# Altium PCB project.PcbDoc
Units mm, origin at the board's own origin, x right, y up, seen from the top; angles counter-clockwise.
Board outline 70.2 x 69.13 mm, 4 copper layers (Top Layer, Int1 (GND), Int2 (PWR), Bottom Layer), stack 1.591 mm thick; 49 components, 41 nets, 190 pads, 27 vias.
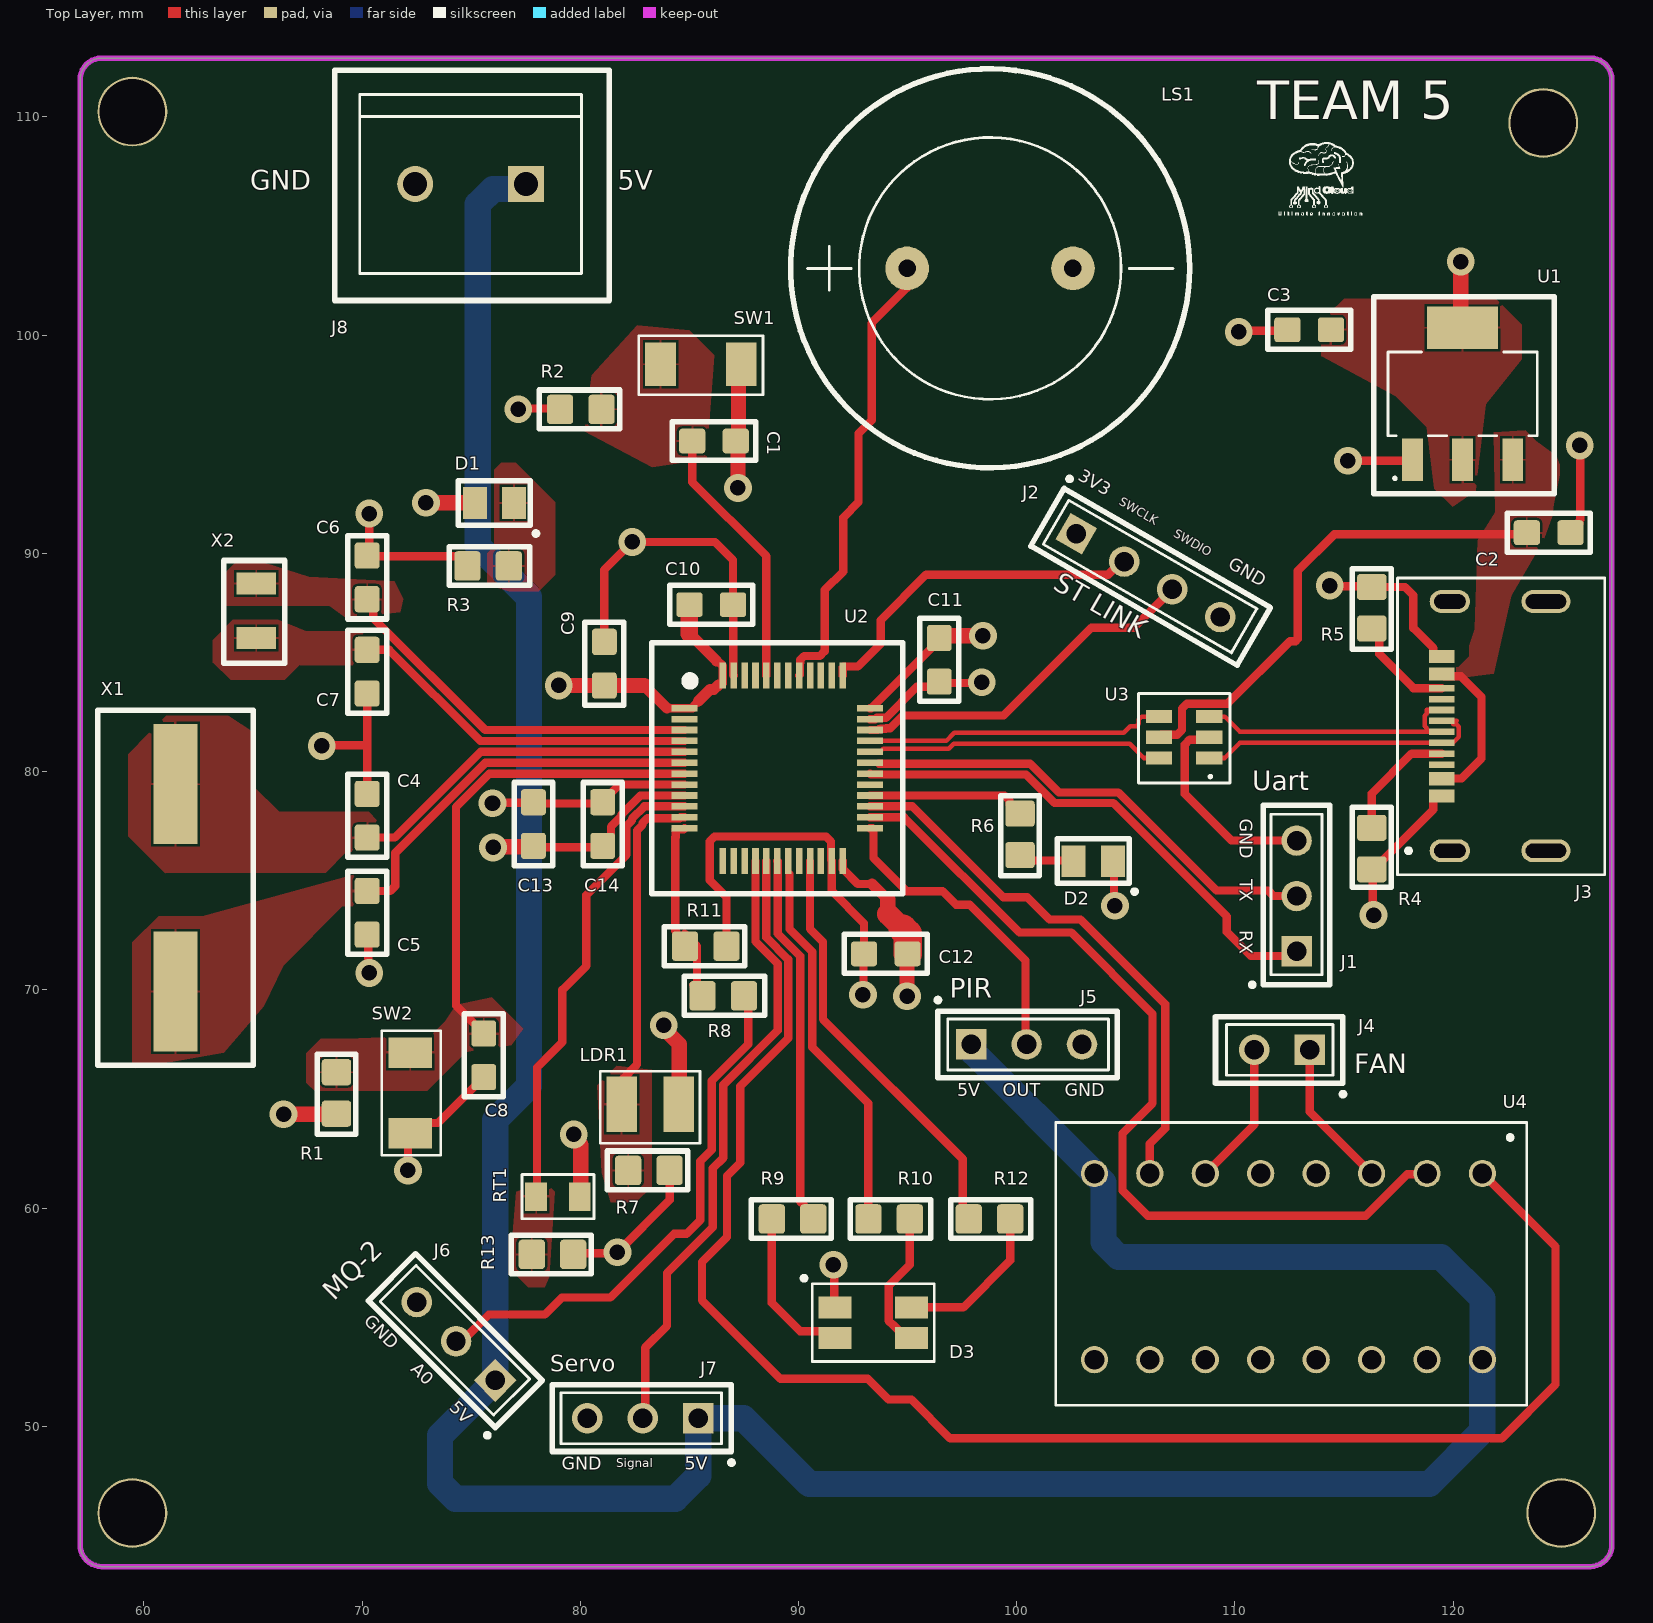
[diagram p0: Top Layer view]
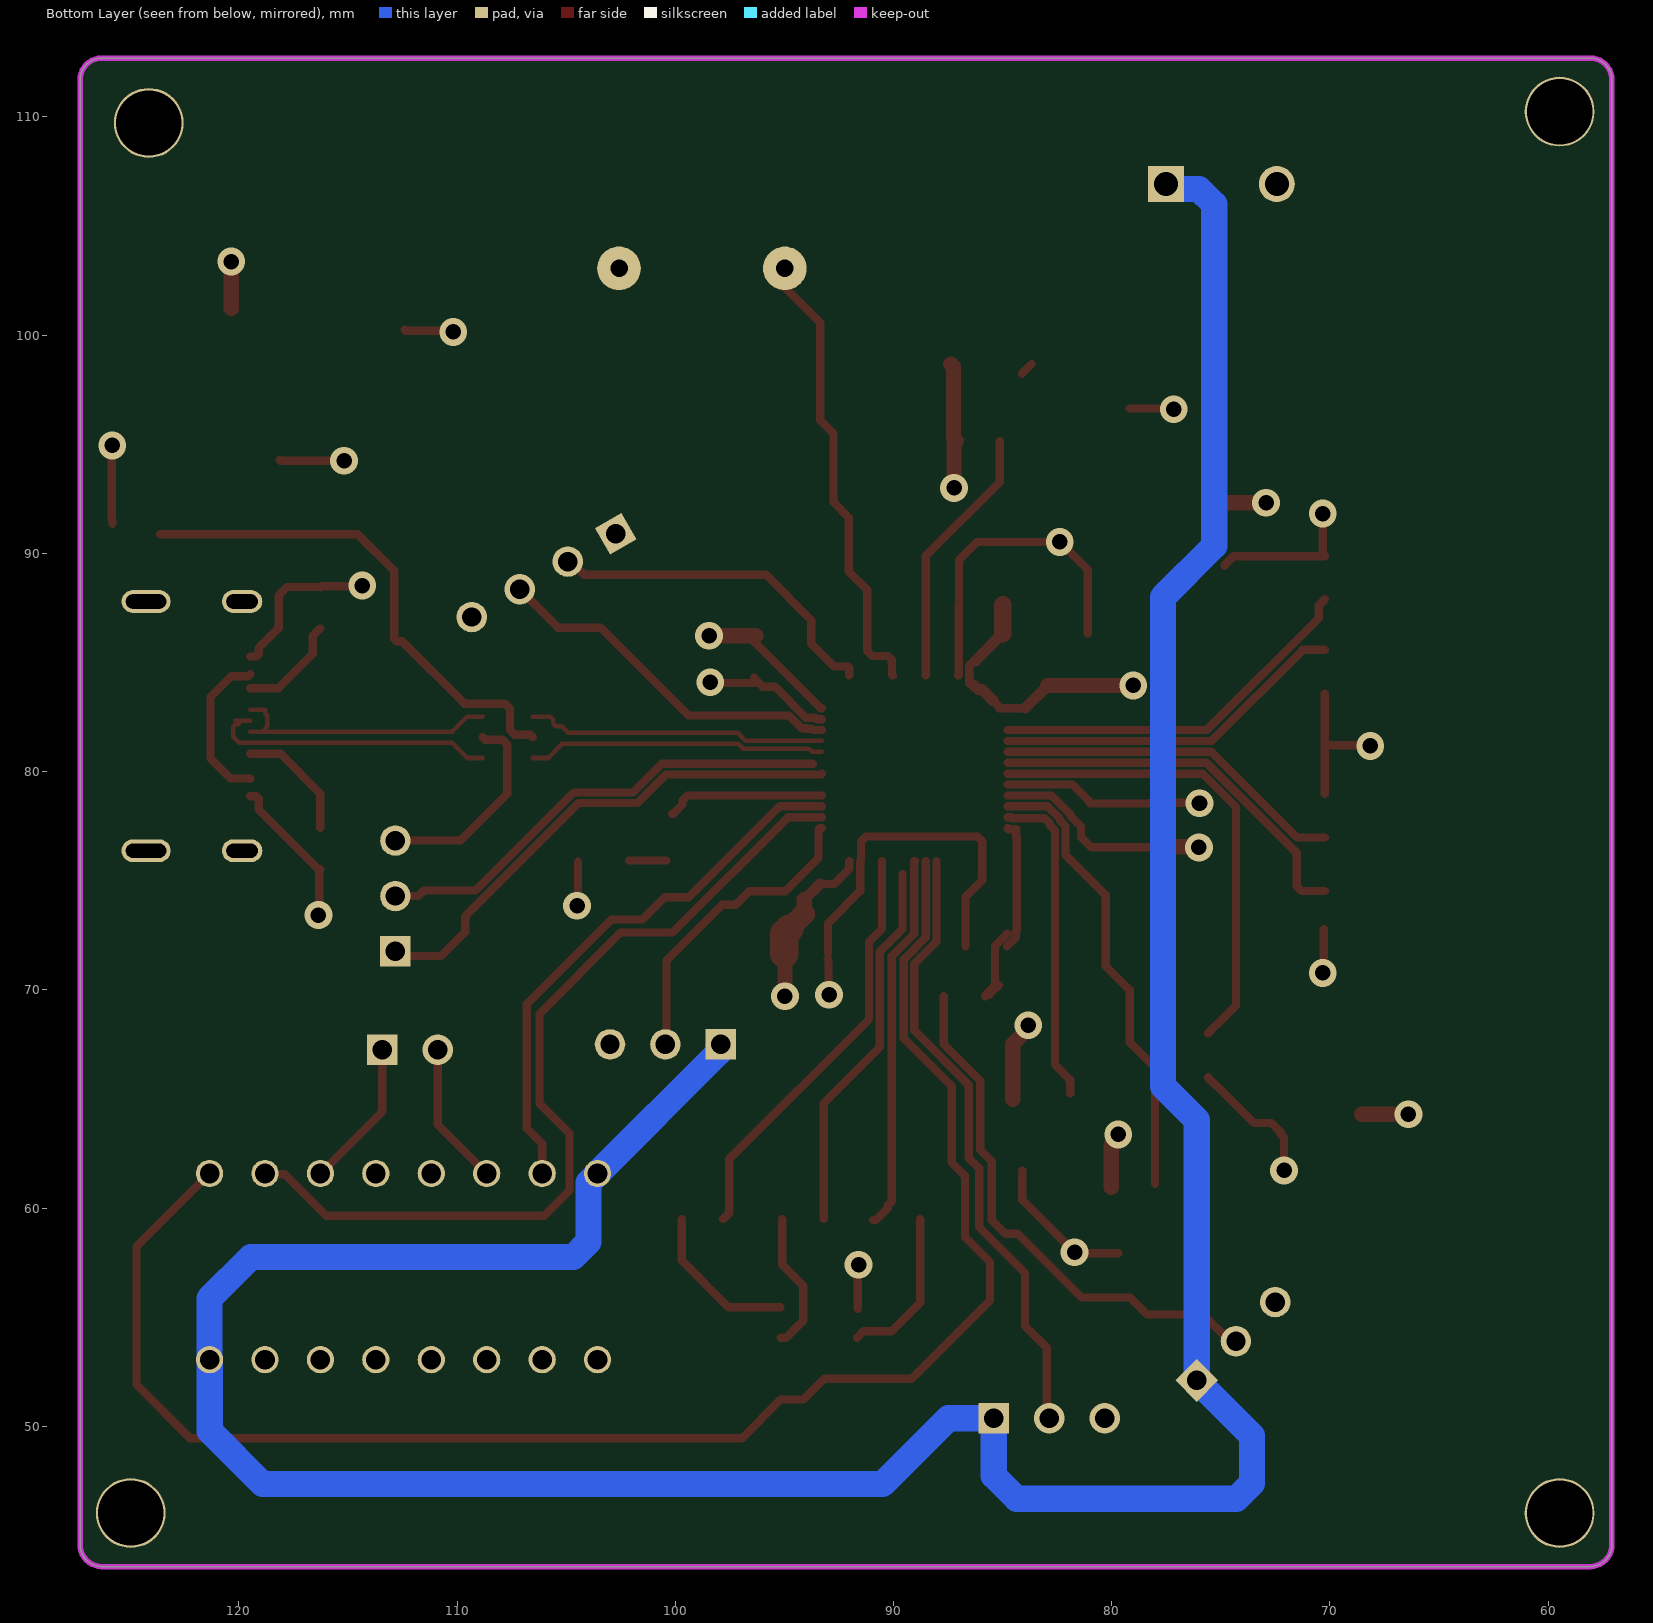
[diagram p1: Bottom Layer view, seen from below]
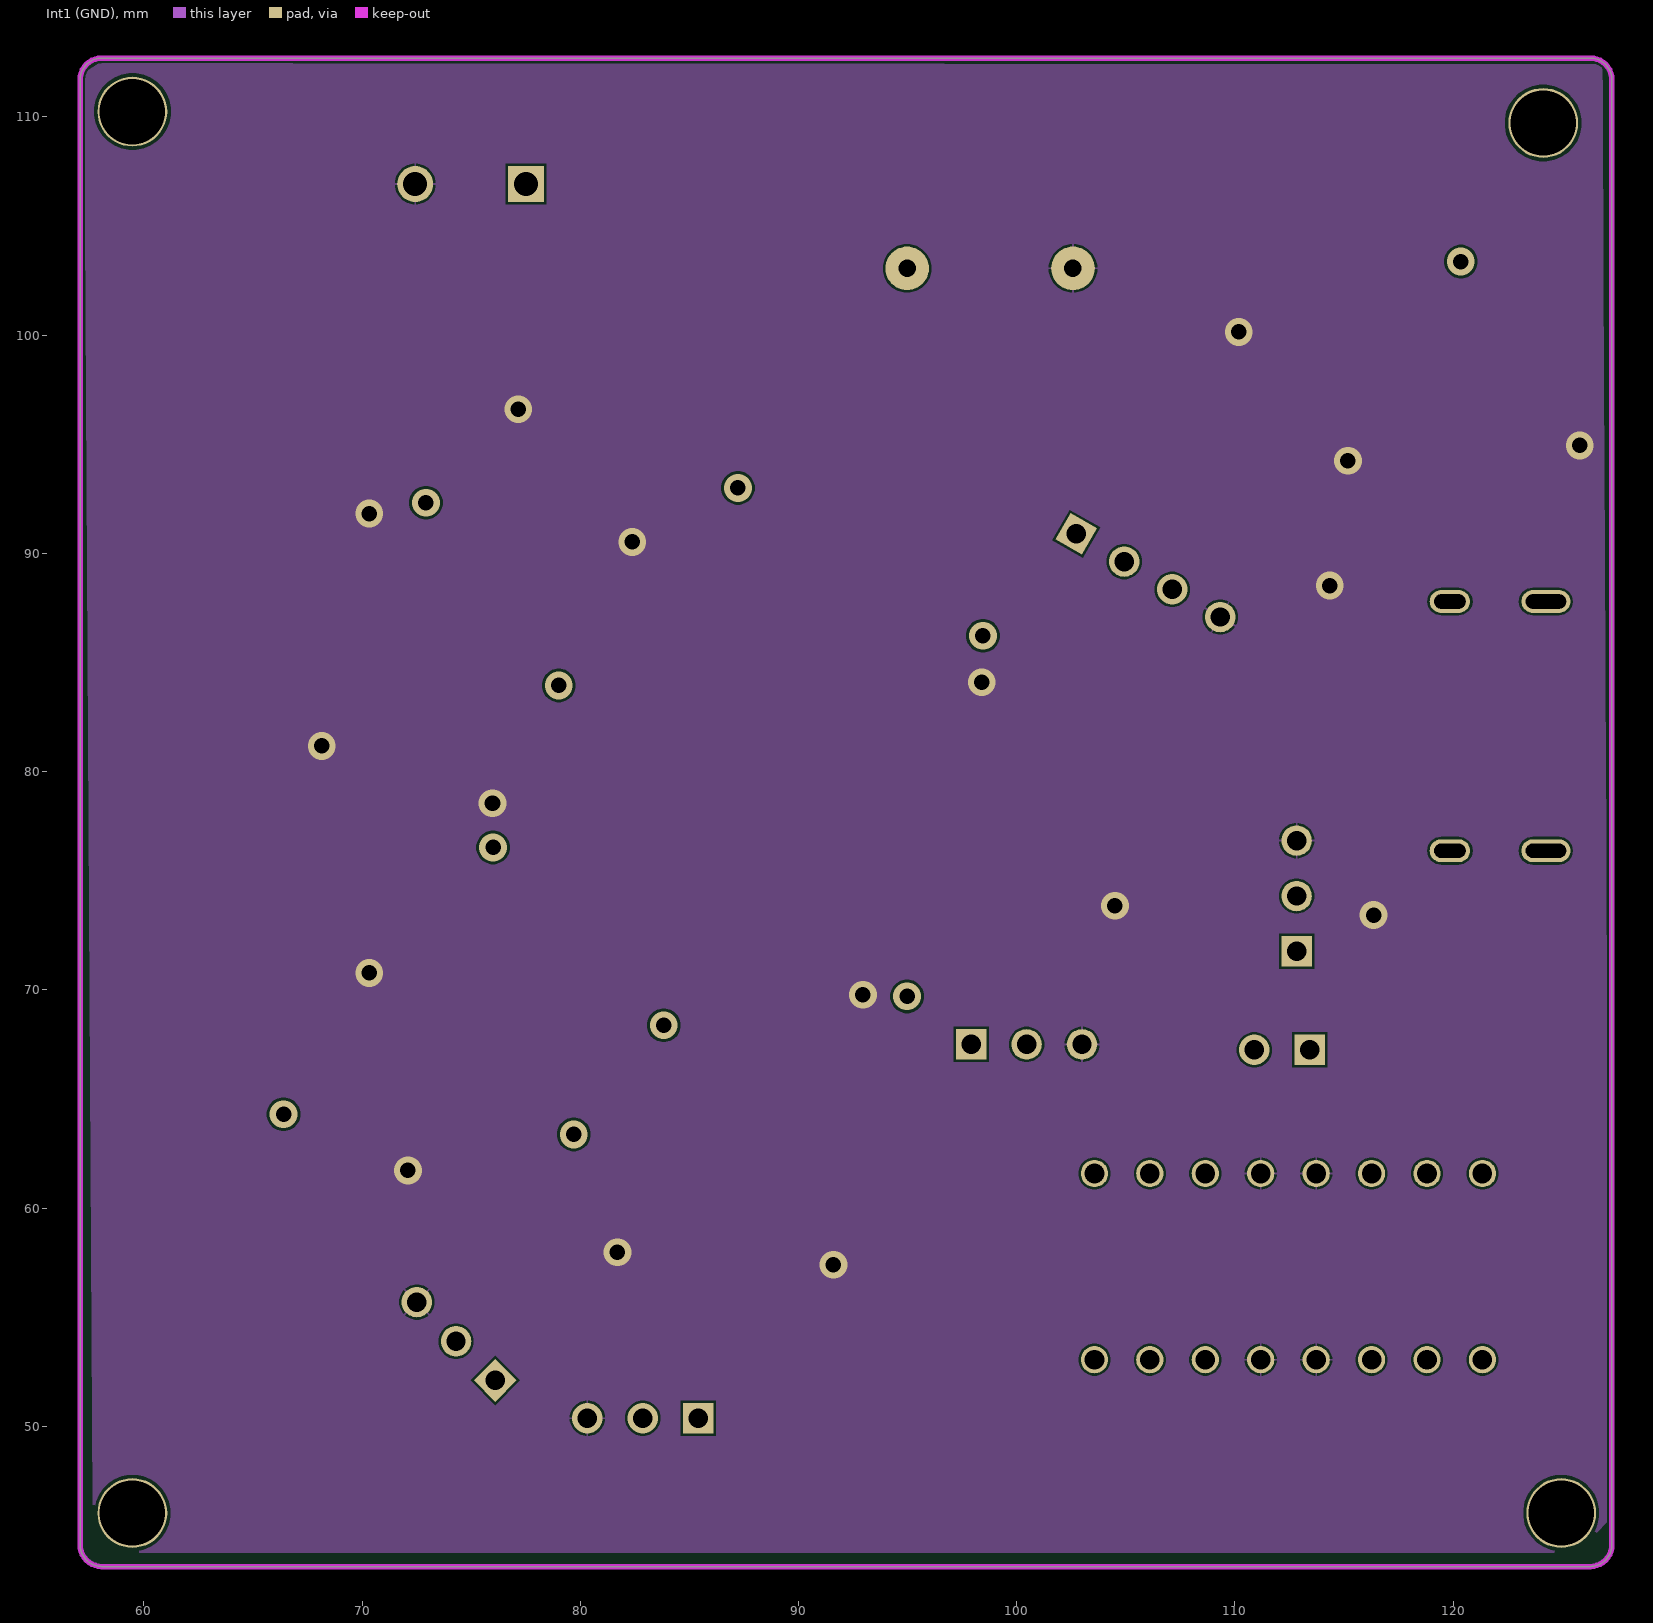
[diagram p2: Int1 (GND)]
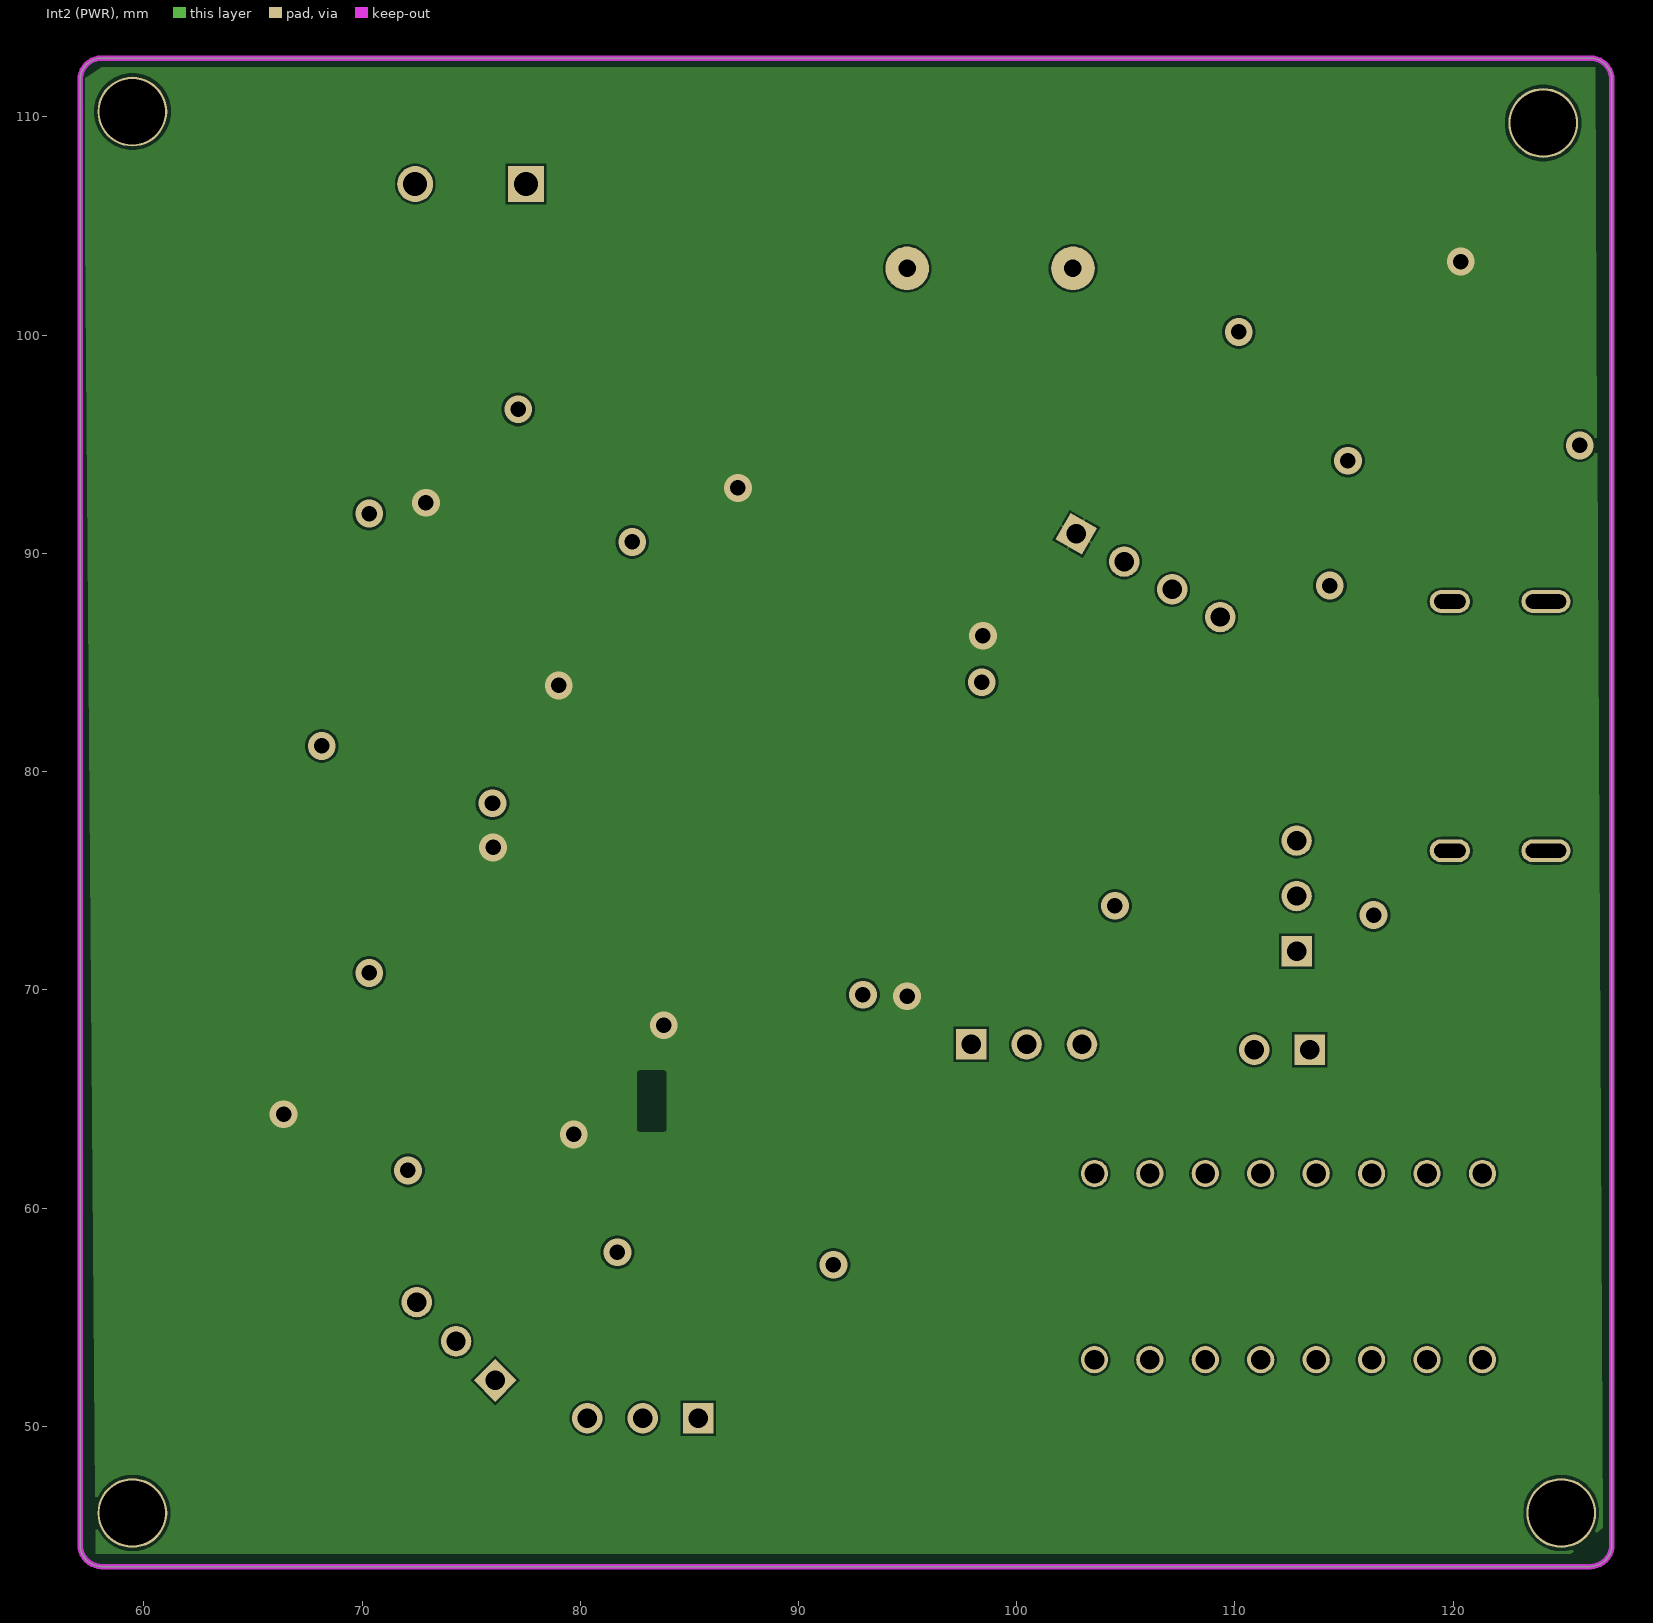
[diagram p3: Int2 (PWR)]
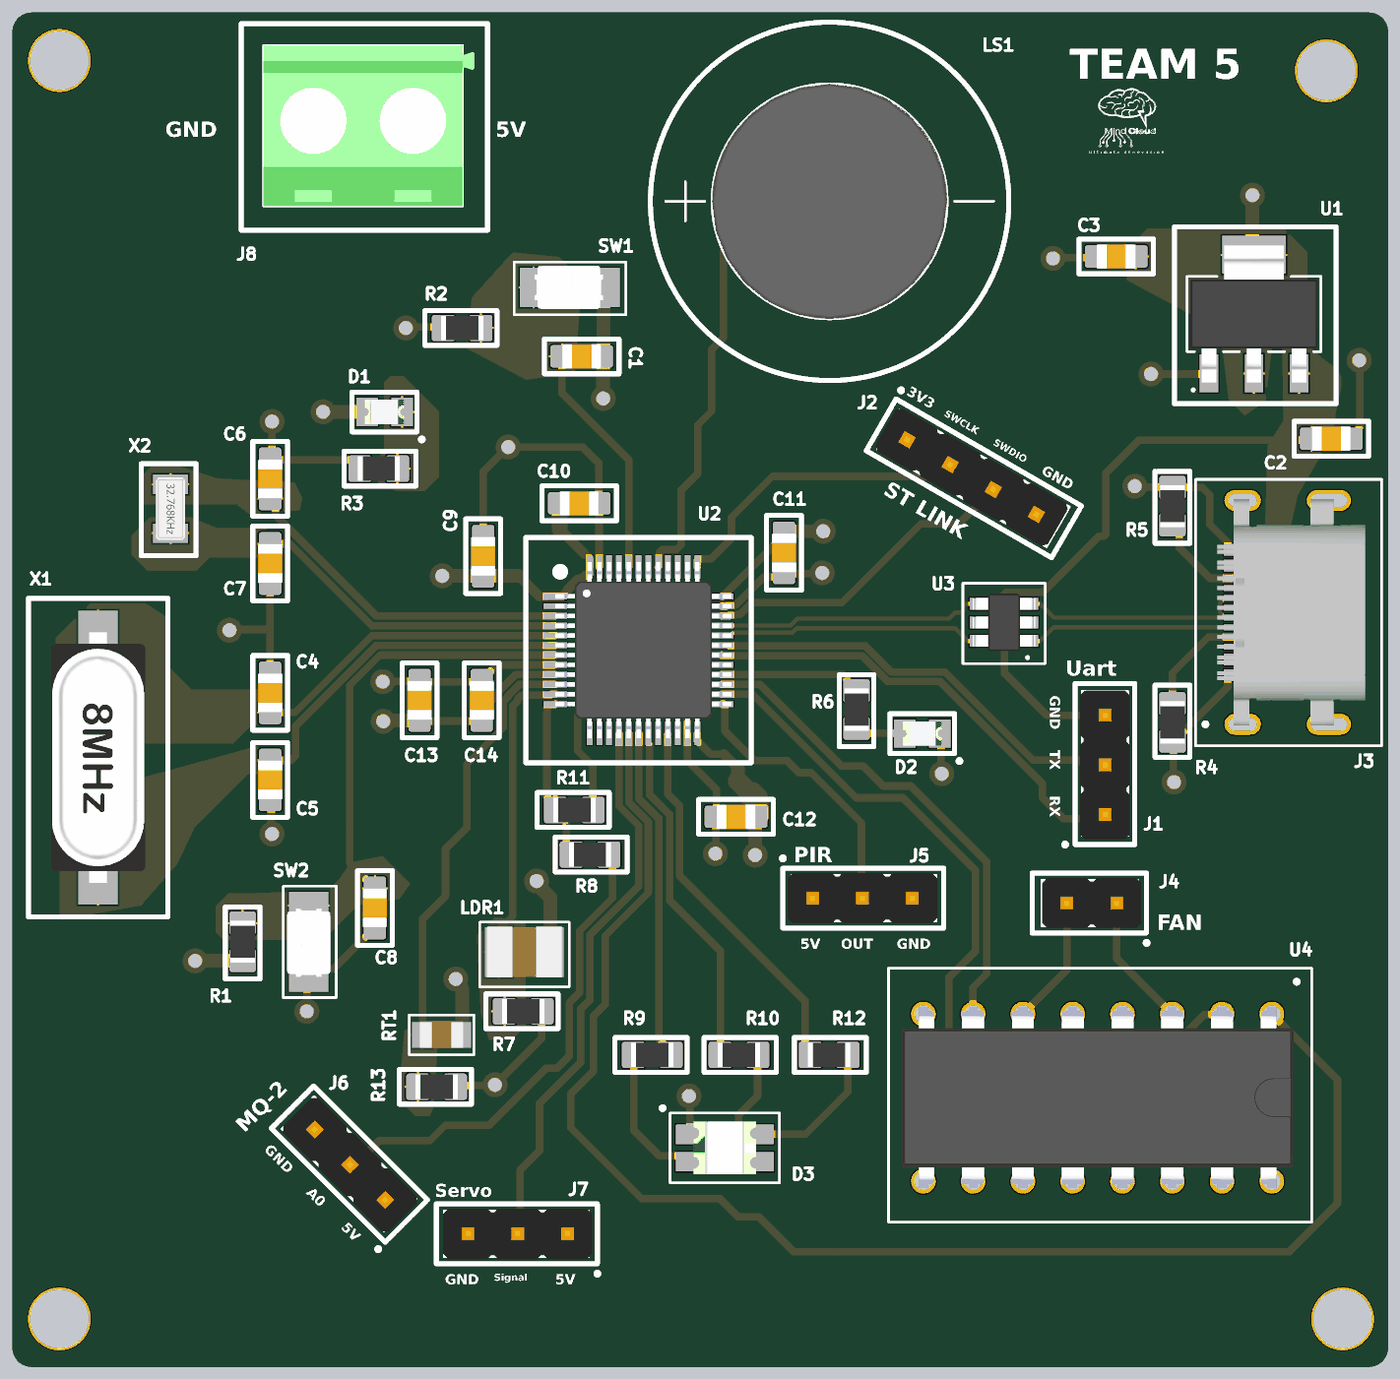
[diagram p4: 3D render of the assembled board from above, using the file's embedded part models]

## Layer stack, top to bottom
Top Solder: solder mask 0.0254, SM-001, Dk 4
Top Layer: signal copper 0.035
Dielectric 2: prepreg 0.2104, PP-017, Dk 4.3
Int1 (GND): signal copper 0.0175
Dielectric 3: core 1.065, Core-039, Dk 4.8
Int2 (PWR): signal copper 0.0175
Dielectric 4: prepreg 0.2104, PP-017, Dk 4.3
Bottom Layer: signal copper 0.035
Bottom Solder: solder mask 0.0254, SM-001, Dk 4

## Board outline
57.075,44.573 57.075,111.7 cw(c58.075,111.7) 58.075,112.7 126.275,112.7 cw(c126.275,111.7) 127.275,111.7 127.275,44.573 cw(c126.275,44.573) 126.275,43.573 58.075,43.573 cw(c58.075,44.573)

## Design rules (kind name [scope] priority, off if disabled: settings)
BoardOutlineClearance [All] p1: gap=0.2 ignorepadtopadclearanceinfootprint=FALSE
Clearance [All] p1: gap=0.102 ignorepadtopadclearanceinfootprint=FALSE except(0.127: Arc-Via Track-Via SMDPad-Via THPad-Via Via-Via Via-Fill Via-Poly Via-Region Via-Text; 0.25: Arc-Hole Track-Hole SMDPad-Hole THPad-Hole Via-Hole Fill-Hole Poly-Hole Region-Hole Text-Hole)
ComponentClearance [All] p1: gap=0.102 collisioncheckmode=3 verticalgap=0.102 showdistances=TRUE
DiffPairsRouting [All] p1: maxlimit=0.127 minlimit=0.127 mostfreqgap=0.127 toplayer_minwidth=0.208 toplayer_maxwidth=0.208 toplayer_prefwidth=0.208 midlayer1_minwidth=0.147 midlayer1_maxwidth=0.147 midlayer1_prefwidth=0.147 midlayer2_minwidth=0.147 midlayer2_maxwidth=0.147 midlayer2_prefwidth=0.147 bottomlayer_minwidth=0.208 bottomlayer_maxwidth=0.208 bottomlayer_prefwidth=0.208 impedanceprofiledriven=TRUE impedanceprofileid={F119903C-DABD-4F0F-A747-4F7ECFE82933} impedanceprofilevalue=90.000000 maxuncoupledlength=14
Height [All] p1: minheight=0 maxheight=1816.048 prefheight=12.7
HoleSize [All] p1: absolutevalues=TRUE maxlimit=6.3 minlimit=0.2 maxpercent=80.000 minpercent=20.000
HoleToHoleClearance [All] p1: gap=0.25 allowstackedmicrovias=FALSE
MinimumAnnularRing [All] p1: minimumring=0.076
MinimumSolderMaskSliver [All] p1: minsoldermaskwidth=0
PlaneClearance [All] p1: clearance=0.102
PlaneConnect PlaneConnectPowerPads [InPadClass('PowerPads')] p1: planeconnectstyle=Direct reliefexpansion=0.508 reliefentries=4 reliefconductorwidth=0.254 reliefairgap=0.254
PlaneConnect [All] p2: pad.planeconnectstyle=Relief pad.reliefexpansion=0.3 pad.reliefentries=4 pad.reliefconductorwidth=0.102 pad.reliefairgap=0.102 via.planeconnectstyle=Direct via.reliefexpansion=0.3 via.reliefentries=4 via.reliefconductorwidth=0.127 via.reliefairgap=0.127
PolygonConnect PolygonConnectPowerPads [All vs (InPadClass('PowerPads'))] p1: connectstyle=Direct reliefconductorwidth=0.254 reliefentries=4 polygonreliefangle="90 Angle" airgapwidth=0.254
PolygonConnect [All] p2: thpad.connectstyle=Relief thpad.reliefconductorwidth=0.102 thpad.reliefentries=4 thpad.polygonreliefangle="90 Angle" thpad.airgapwidth=0.102 smdpad.connectstyle=Relief smdpad.reliefconductorwidth=0.102 smdpad.reliefentries=4 smdpad.polygonreliefangle="90 Angle" smdpad.airgapwidth=0.102 via.connectstyle=Direct via.reliefconductorwidth=0.127 via.reliefentries=4 via.polygonreliefangle="90 Angle" via.airgapwidth=0.127
RoutingVias [All] p1: holewidth=0.2 width=0.45 viastyle="Through Hole" minholewidth=0.2 minwidth=0.45 maxholewidth=6.3 maxwidth=6.55
SilkToSilkClearance [All] p1: silktosilkclearance=0
SilkToSolderMaskClearance [IsPad] p1: minsilkscreentomaskgap=0.07 clearancetoexposedcopper=TRUE
SolderMaskExpansion [All] p1: expansion=0.075 istentingtop=FALSE
SupplyNets "Schematic Supply Nets_3" [InNet('VBUS')] p1: voltage=0.000
SupplyNets "Schematic Supply Nets_2" [InNet('+3V3')] p2: voltage=0.000
SupplyNets "Schematic Supply Nets_1" [InNet('GND')] p3: voltage=0.000
SupplyNets "Schematic Supply Nets" [InNet('+5')] p4: voltage=0.000
Width [All] p1: maxlimit=1816.048 minlimit=0.102 preferedwidth=0.102
20 further rules are at their usual default settings.

## Classes and differential pairs
differential pair class USB_Diff: USB
differential pair class ESD_DIFF: ESD
component class Sensors&Actuators: D2 D3 J4 J5 J6 J7 J8 LDR1 LS1 R6 R7 R8 R9 R10 R11 R12 R13 RT1 U4
component class STM: C1 C2 C3 C4 C5 C6 C7 C8 C9 C10 C11 C12 C13 C14 D1 J1 J2 J3 R1 R2 R3 R4 R5 SW1 SW2 U1 U2 U3 X1 X2
differential pair USB: +USB_P -USB_N
differential pair ESD: +ESD_P -ESD_N

## Components (designator, comment, footprint, x,y, rotation, side; value= is the part's Value field where it differs from the comment)
C1 "100nf" Cap_0805 86.125,95.15 r0 top
C2 "10uf" Cap_0805 124.375,90.95 r180 top
C3 "10uf" Cap_0805 113.4,100.25 r0 top
C4 "20pf" Cap_0805 70.231,77.978 r270 top
C5 "20pf" Cap_0805 70.231,73.533 r90 top
C6 "12pf" Cap_0805 70.231,88.9 r270 top
C7 "12pf" Cap_0805 70.231,84.582 r90 top
C8 "100nf" Cap_0805 75.575,67 r90 top
C9 "10uf" Cap_0805 81.1,84.95 r270 top
C10 "100nf" Cap_0805 86,87.65 r180 top
C11 "100nf" Cap_0805 96.45,85.125 r90 top
C12 "100nf" Cap_0805 94,71.65 r0 top
C13 "1uf" Cap_0805 77.851,77.597 r270 top
C14 "10nf" Cap_0805 81.026,77.597 r270 top
D1 "LED_0805" LED_0805 76.064,92.312 r180 top
D2 "LED_0805" LED_0805 103.5,75.9 r180 top
D3 "RGB_LED" RGB_LED 93.425,54.75 r0 top
J1 "UART" pin_header_3 112.825,80.65 r90 top
J2 "ST_LINK" pin_header_4 110.424,86.45 r330 top
J3 "USB-C" USB_C 124.75,82.075 r90 top
J4 "FAN" pin_header_2 104.535,67.25 r180 top
J5 "PIR" pin_header_3 106.8,67.5 r0 top
J6 "MQ-2" pin_header_3 69.814,58.386 r135 top
J7 "Servo" pin_header_3 76.511,50.368 r180 top
J8 "Terminal" Terminal 74.975,106.925 r180 top
LDR1 "LDR" LDR 83.2,64.75 r0 top
LS1 "Buzzer" Buzzer 98.777,103.063 r0 top
R1 "10K" RES_0805 68.825,65.275 r90 top
R2 "10K" RES_0805 80.025,96.6 r0 top
R3 "220" RES_0805 75.774,89.424 r180 top
R4 "5.1K" RES_0805 116.269,76.472 r270 top
R5 "5.1K" RES_0805 116.269,87.509 r90 top
R6 "220" RES_0805 100.15,77.125 r90 top
R7 "10K" RES_0805 83.143,61.725 r0 top
R8 "10K" RES_0805 86.55,69.725 r180 top
R9 "220" RES_0805 89.725,59.5 r0 top
R10 "220" RES_0805 94.15,59.5 r180 top
R11 "20K" RES_0805 85.75,72 r0 top
R12 "220" RES_0805 98.75,59.5 r180 top
R13 "10K" RES_0805 78.725,57.875 r0 top
RT1 "NTC_0805" NTC_0805 78.975,60.525 r0 top
SW1 "Switch" switch 85.475,98.675 r0 top
SW2 "Switch" switch 72.2,65.225 r90 top
U1 "AMS1117_3.3" AMS1117 120.431,97.311 r90 top
U2 "STM32F103C8T6" STM32F103C8T6 89.027,81.407 r0 top
U3 "USBLC6-2SC6" USBLC6-2SC6 107.675,81.575 r180 top
U4 "L293D" L293D 112.45,57.317 r270 top
X1 "Xtal_8mhz" Xtal_8mhz 61.45,74.675 r270 top
X2 "Xtal_32khz" Xtal_32khz 65.151,87.376 r270 top

## Footprints (in the part's own frame and the unit in brackets; to place one, negate y for a bottom-side part, rotate by r counter-clockwise, add the part's x,y. Pads: shape width x height; smd on the part's side, far side on the other; paste and mask are expansions set on the pad)
AMS1117 [mm]
  rect 1.95x0.95 smd: 1(-3.025,2.3) 2(-3.025,0) 3(-3.025,-2.3)
  rect 1.95x3.25 smd: 2(3.025,0)
  silkscreen extent -4.57,-4.19 4.44,4.06, body extent -3.5,-3.25 3.5,3.25, height 1.8
Buzzer [mm]
  round 2 hole 0.8: 1(-3.8,0) 2(3.8,0)
  silkscreen extent -9.14,-9.14 9.14,9.14, body extent -6,-6 6,5.99, height 9
Cap_0805 [mm]
  rrect25% 1.2x1.14 smd: 1(-1,0) 2(1,0)
  silkscreen extent -1.91,-0.89 1.91,0.89, body extent -1,-0.63 1,0.63, height 0.6
L293D [mm]
  round 1.25 hole 0.9: 1(-4.267,8.89) 2(-4.267,6.35) 3(-4.267,3.81) 4(-4.267,1.27) 5(-4.267,-1.27) 6(-4.267,-3.81) 7(-4.267,-6.35) 8(-4.267,-8.89) 9(4.267,-8.89) 10(4.267,-6.35) 11(4.267,-3.81) 12(4.267,-1.27) 13(4.267,1.27) 14(4.267,3.81) 15(4.267,6.35) 16(4.267,8.89)
  silkscreen extent -6.6,-10.67 6.35,10.92, body extent -4.62,-10 4.62,10, height 5.1
LDR [mil]
  rect 55x100 smd paste+0 mask+0: 1(-51.5,0) 2(51.5,0)
  silkscreen extent -90,-70 90,60, body extent -75,-51 75,51, height 26
LED_0805 [mm]
  rect 1.1x1.45 smd: 1(0.889,0) 2(-0.9,0)
  silkscreen extent -2,-1.02 1.65,1.5, body extent -1,-0.63 1,0.63, height 0.7
NTC_0805 [mm]
  rect 1x1.3 smd paste+0 mask+0: 1(-1,0) 2(1,0)
  silkscreen extent -1.65,-1.02 1.65,1.02, body extent -1.1,-0.7 1.1,0.7, height 0.94
pin_header_2 [mm]
  rect 1.398x1.398 hole 0.89: 1(-8.89,0)
  round 1.398 hole 0.89: 2(-6.35,0)
  silkscreen extent -10.51,-1.52 -4.57,2.13, body extent -10.16,-1.27 -5.08,1.27, height 8.89
pin_header_3 [mm]
  rect 1.398x1.398 hole 0.89: 1(-8.89,0)
  round 1.398 hole 0.89: 2(-6.35,0) 3(-3.81,0)
  silkscreen extent -10.51,-1.52 -2.2,2.13, body extent -10.16,-1.27 -2.54,1.27, height 8.89
pin_header_4 [mm]
  rect 1.398x1.398 hole 0.89: 1(-8.89,0)
  round 1.398 hole 0.89: 2(-6.35,0) 3(-3.81,0) 4(-1.27,0)
  silkscreen extent -10.51,-1.52 0.51,2.13, body extent -10.16,-1.27 0,1.27, height 8.89
RES_0805 [mm]
  rrect25% 1.2x1.35 smd: 1(-0.95,0) 2(0.95,0)
  silkscreen extent -1.9,-0.89 1.78,0.89, body extent -1.07,-0.63 1.07,0.63, height 0.6
RGB_LED [mm]
  rect 1.5x1 smd: 1(-1.75,0.7) 2(-1.75,-0.7) 3(1.75,-0.7) 4(1.75,0.7)
  silkscreen extent -3.27,-1.78 2.79,2.13, body extent -1.6,-1.35 1.6,1.35, height 1.1
STM32F103C8T6 [mm]
  rect 1.2x0.3 smd paste+0 mask+0.05: 1(-4.25,1.5) 2(-4.25,1) 3(-4.25,0.5) 4(-4.25,0) 5(-4.25,-0.5) 6(-4.25,-1) 7(-4.25,-1.5) 8(-4.25,-2) 9(-4.25,-2.5) 10(-4.25,-3) 11(-4.25,-3.5) 12(-4.25,-4) 25(4.25,-4) 26(4.25,-3.5) 27(4.25,-3) 28(4.25,-2.5) 29(4.25,-2) 30(4.25,-1.5) 31(4.25,-1) 32(4.25,-0.5) 33(4.25,0) 34(4.25,0.5) 35(4.25,1) 36(4.25,1.5)
  rect 0.3x1.2 smd paste+0 mask+0.05: 13(-2.5,-5.5) 14(-2,-5.5) 15(-1.5,-5.5) 16(-1,-5.5) 17(-0.5,-5.5) 18(0,-5.5) 19(0.5,-5.5) 20(1,-5.5) 21(1.5,-5.5) 22(2,-5.5) 23(2.5,-5.5) 24(3,-5.5) 37(3,3) 38(2.5,3) 39(2,3) 40(1.5,3) 41(1,3) 42(0.5,3) 43(0,3) 44(-0.5,3) 45(-1,3) 46(-1.5,3) 47(-2,3) 48(-2.5,3)
  silkscreen extent -5.75,-7 5.75,4.5, body extent -4.25,-5.75 4.75,3.25, height 1.6
switch [mm]
  rect 1.4x2 smd paste+0 mask+0.05: 1(-1.8,0) 2(1.9,0)
  silkscreen extent -2.8,-1.4 2.9,1.3, body extent -1.75,-1.1 1.75,1.1, height 0.7
Terminal [mm]
  rect 1.65x1.65 hole 1.1: 1(-2.54,0)
  round 1.65 hole 1.1: 2(2.54,0)
  silkscreen extent -6.35,-5.21 6.22,5.33, body extent -5.68,-4.1 5.08,4.1, height 10
USB_C [mm]
  rect 0.6x1.15 smd: A1(-3.2,5.275) A4(-2.4,5.275) B1(3.2,5.275) B4(2.4,5.275)
  rect 0.3x1.15 smd: A5(-1.25,5.275) A6(-0.25,5.275) A7(0.25,5.275) A8(1.25,5.275) B5(1.75,5.275) B6(0.75,5.275) B7(-0.75,5.275) B8(-1.75,5.275)
  oval 1.05x1.85 hole 0.65 slot 1.45 at 90 deg: S1(-5.7,4.9) S2(5.72,4.9)
  oval 1.05x2.25 hole 0.65 slot 1.85 at 90 deg: S3(-5.7,0.5) S4(5.72,0.5)
  silkscreen extent -6.8,-2.2 6.8,7.3, body extent -5.77,-1.35 5.77,6.2, height 1.58
USBLC6-2SC6 [mm]
  rect 1.2x0.6 smd: 1(-1.15,0.95) 2(-1.15,0) 3(-1.15,-0.95) 4(1.15,-0.95) 5(1.15,0) 6(1.15,0.95)
  silkscreen extent -2.1,-2 2.1,2.1, body extent -1.6,-1.46 1.6,1.46, height 1.15
Xtal_8mhz [mm]
  rect 5.5x2 smd paste+0 mask+0.05: 1(-4.75,0) 2(4.75,0)
  silkscreen extent -8.13,-3.56 8.13,3.56, body extent -6.4,-2.41 6.4,2.41, height 4.3
Xtal_32khz [mm]
  rect 1x1.8 smd paste+0 mask+0.05: 1(-1.25,0) 2(1.25,0)
  silkscreen extent -2.3,-1.5 2.4,1.3, body extent -1.6,-0.75 1.6,0.75, height 0.8

## Part data
C1 C8 C10 C11 C12: library part Cap_0805_100nf, "CAP CER 100nF 50V X7R 0805", MFR="Samsung Electro-Mechanics", MFR PART#=CL21B104KBCNNNC, ComponentLink1Description="Data Sheet", ComponentLink1URL=https://www.lcsc.com/datasheet/C15850.pdf?spm=wm.sxq.inf.ggs___wm.fly.bg.0.xh&lcsc_vid=RAIMXwZeRgRXUFAAT1RZBAEFEVIIVgdSQFlfUgUDFQcxVlNeQVVYX1FWR1FeVDsOAxUeFF5JWBYZEEoKFBINSQcJGk4eFQsCAgIaSgADAwAHC0slT1VdUFJIHxUDCw%3D%3D, Supplier=LCSC, Supplier PART#=C1711
C2 C3 C9: library part Cap_0805_10uf, "CAP CER 10uF 25V X5R 0805", MFR="Samsung Electro-Mechanics", MFR PART#=CL21A106KAYNNNE, ComponentLink1Description="Data Sheet", ComponentLink1URL=https://www.lcsc.com/datasheet/C15850.pdf?spm=wm.sxq.inf.ggs___wm.fly.bg.0.xh&lcsc_vid=RAIMXwZeRgRXUFAAT1RZBAEFEVIIVgdSQFlfUgUDFQcxVlNeQVVYX1FWR1FeVDsOAxUeFF5JWBYZEEoKFBINSQcJGk4eFQsCAgIaSgADAwAHC0slT1VdUFJIHxUDCw%3D%3D, Supplier=LCSC, Supplier PART#=C15850
C4 C5: library part Cap_0805_20pf, "CAP CER 20pF 50V C0G 0805", MFR="Samsung Electro-Mechanics", MFR PART#=CL21C200JBANNNC, ComponentLink1Description="Data Sheet", ComponentLink1URL=https://www.lcsc.com/datasheet/C1798.pdf?spm=wm.sxq.inf.ggs___wm.ssy.bg.11.xh&lcsc_vid=RAIMXwZeRgRXUFAAT1RZBAEFEVIIVgdSQFlfUgUDFQcxVlNeQFJfX1ZeR1FXVjsOAxUeFF5JWBYZEEoKFBINSQcJGk4dAgUUFAk%3D, Supplier=LCSC, Supplier PART#=C1798
C6 C7: library part Cap_0805_12pf, "CAP CER 12pF 50V C0G 0805", MFR="Samsung Electro-Mechanics", MFR PART#=CL21C120JBANNNC, ComponentLink1Description="Data Sheet", ComponentLink1URL=https://www.lcsc.com/datasheet/C170110.pdf?spm=wm.sxq.inf.ggs___wm.fly.bg.0.xh&lcsc_vid=RAIMXwZeRgRXUFAAT1RZBAEFEVIIVgdSQFlfUgUDFQcxVlNeQFJfX1BXQVdcVzsOAxUeFF5JWBYZEEoKFBINSQcJGk4dAgUUFAk%3D, Supplier=LCSC, Supplier PART#=C170110
C13: library part Cap_0805_1uf, "CAP CER 1uF 50V X7R 0805", MFR="Samsung Electro-Mechanics", MFR PART#=CL21B105KBFNNNE, ComponentLink1Description="Data Sheet", ComponentLink1URL=https://www.lcsc.com/datasheet/C15850.pdf?spm=wm.sxq.inf.ggs___wm.fly.bg.0.xh&lcsc_vid=RAIMXwZeRgRXUFAAT1RZBAEFEVIIVgdSQFlfUgUDFQcxVlNeQVVYX1FWR1FeVDsOAxUeFF5JWBYZEEoKFBINSQcJGk4eFQsCAgIaSgADAwAHC0slT1VdUFJIHxUDCw%3D%3D, Supplier=LCSC, Supplier PART#=C28323
C14: library part Cap_0805_10nf, "CAP CER 10nF 50V X7R 0805", MFR="Samsung Electro-Mechanics", MFR PART#=CL21B103KBANNNC, ComponentLink1Description="Data Sheet", ComponentLink1URL=https://www.lcsc.com/datasheet/C1710.pdf?spm=wm.sxq.inf.ggs___wm.ssy.bg.3.xh&lcsc_vid=RAIMXwZeRgRXUFAAT1RZBAEFEVIIVgdSQFlfUgUDFQcxVlNeQFJfX1VQRFlaXjsOAxUeFF5JWBYZEEoKFBINSQcJGk4dAgUUFAk%3D, Supplier=LCSC, Supplier PART#=C1710
D1 D2: "LED RED 0805 SMD", MFR=YONGYUTAI, MFR PART#=YLED0805R, ComponentLink1Description="Data Sheet", ComponentLink1URL=https://www.lcsc.com/datasheet/C19171391.pdf?spm=wm.sxq.inf.ggs___wm.fly.bg.0.xh&lcsc_vid=RAIMXwZeRgRXUFAAT1RZBAEFEVIIVgdSQFlfUgUDFQcxVlNeQVRaUlRVRlZcXjsOAxUeFF5JWBYZEEoKFBINSQcJGk4NBhADEA4cHktXRlhXSQwSGg0%3D, Supplier=LCSC, Supplier PART#=C19171391
D3: "TriColor ChipLED", MFR=Broadcom, MFR PART#=HSMF-C118, ComponentLink1Description="Data Sheet", ComponentLink1URL=https://www.lcsc.com/datasheet/C6795867.pdf?spm=wm.sxq.inf.ggs___wm.fly.bg.1.xh&lcsc_vid=FgVdAVJeFgAKAVAAT1ldBVYDR1ZcX11XR1lZVl1WEQMxVlNeT1dcXlZURlZaVjsOAxUeFF5JWBYZEEoKFBINSQcJGk4NBhADEA4cHktSRlFADxALGw%3D%3D, Supplier=LCSC, Supplier PART#=C6795867
J1 J5 J6 J7: library part pin_header_3, "1kV 1 2.54mm Pin Header 3A 2.5mm Through Hole 6mm 3P -40℃~+105℃ 3mm Gold 1x3P Through Hole,P=2.54mm Headers, Male Pins", MFR=hanxia, MFR PART#="HX PH254-01-03-Z-L11.5 pcb pin header", ComponentLink1Description="Data Sheet", ComponentLink1URL=https://www.lcsc.com/datasheet/C52016391.pdf?spm=wm.sxq.inf.ggs___wm.fly.bg.1.xh&lcsc_vid=RAIMXwZeRgRXUFAAT1RZBAEFEVIIVgdSQFlfUgUDFQcxVlNeQFJcUFdRQlZdUDsOAxUeFF5JWBYZEEoKFBINSQcJGk4NBhADEA4cHktXT1BADxALGw%3D%3D, Supplier=LCSC, Supplier PART#=C52016391
J2: library part pin_header_4, "1kV 1 2.54mm Pin Header 3A 2.5mm Through Hole 6mm -40℃~+105℃ 3mm Gold 4P 1x4P Through Hole,P=2.54mm Headers, Male Pins", MFR=hanxia, MFR PART#="HX PH254-01-04-Z-L11.5 straight pin header", ComponentLink1Description="Data Sheet", ComponentLink1URL=https://www.lcsc.com/datasheet/C52016392.pdf?spm=wm.sxq.inf.ggs___wm.fly.bg.0.xh&lcsc_vid=RAIMXwZeRgRXUFAAT1RZBAEFEVIIVgdSQFlfUgUDFQcxVlNeQFJfXlVTRVBWXzsOAxUeFF5JWBYZEEoKFBINSQcJGk4NBhADEA4cHktRTlNADxALGw%3D%3D, Supplier=LCSC, Supplier PART#=C52016392
J3: "CONN RCPT Type-C 16POS SMD", MFR="Korean Hroparts Elec", MFR PART#=TYPE-C-31-M-12, ComponentLink1Description="Data Sheet", ComponentLink1URL=https://www.lcsc.com/datasheet/C165948.pdf?spm=wm.sxq.inf.ggs___wm.fly.bg.1.xh&lcsc_vid=RAIMXwZeRgRXUFAAT1RZBAEFEVIIVgdSQFlfUgUDFQcxVlNeQFJeVVJTRFBWUjsOAxUeFF5JWBYZEEoKFBINSQcJGk4%3D, Supplier=LCSC, Supplier PART#=C165948
J4: library part pin_header_2, "1kV 1 2.54mm Pin Header 3A 2.5mm Through Hole 6mm 3P -40℃~+105℃ 3mm Gold 1x2P Through Hole,P=2.54mm Headers, Male Pins", MFR=hanxia, MFR PART#="HX PH254-01-03-Z-L11.5 pcb pin header", ComponentLink1Description="Data Sheet", ComponentLink1URL=https://www.lcsc.com/datasheet/C52016391.pdf?spm=wm.sxq.inf.ggs___wm.fly.bg.1.xh&lcsc_vid=RAIMXwZeRgRXUFAAT1RZBAEFEVIIVgdSQFlfUgUDFQcxVlNeQFJcUFdRQlZdUDsOAxUeFF5JWBYZEEoKFBINSQcJGk4NBhADEA4cHktXT1BADxALGw%3D%3D, Supplier=LCSC, Supplier PART#=C52016391
J8: "TERM BLK 2POS 5.08mm TH", MFR=KANGNEX, MFR PART#=WJ500V-5.08-2P, ComponentLink1Description="Data Sheet", ComponentLink1URL=https://www.lcsc.com/datasheet/C8465.pdf?spm=wm.sxq.inf.ggs___wm.fly.bg.1.xh&lcsc_vid=RAIMXwZeRgRXUFAAT1RZBAEFEVIIVgdSQFlfUgUDFQcxVlNeQVRaUFdVR1VbVTsOAxUeFF5JWBYZEEoKFBINSQcJGk4dAgUUFAk%3D, Supplier=LCSC, Supplier PART#=C8465
LDR1: "Photoconductive Cell", MFR=JCHL, MFR PART#=GT36516, ComponentLink1Description="Data Sheet", ComponentLink1URL=https://www.lcsc.com/datasheet/C2904880.pdf?spm=wm.sxq.inf.ggs___wm.fly.bg.2.xh&lcsc_vid=FgVdAVJeFgAKAVAAT1ldBVYDR1ZcX11XR1lZVl1WEQMxVlNeT1JZUVBXRVZXUTsOAxUeFF5JWBYZEEoKFBINSQcJGk4dAgUUFAk%3D, Supplier=LCSC, Supplier PART#=C2904880
LS1: "Active Buzzer (Built-in Driving Circuit) 2.3kHz 5V Electromagnetic Alarms, Buzzers, and Sirens", MFR=CUI, MFR PART#=CMI-1295-0585T, ComponentLink1Description="Data Sheet", ComponentLink1URL=https://www.lcsc.com/datasheet/C22359712.pdf?spm=wm.sxq.inf.ggs___wm.fly.bg.0.xh&lcsc_vid=FgVdAVJeFgAKAVAAT1ldBVYDR1ZcX11XR1lZVl1WEQMxVlNeT1dcVFdfRVdcVzsOAxUeFF5JWBYZEEoKFBINSQcJGk4NBhADEA4cHktTRk8GEwkK, Supplier=LCSC, Supplier PART#=C22359712
R1 R2 R7 R8 R13: library part RES_0805_10K, "RES 10kΩ ±0.1% 125mW 0805", MFR=YAGEO, MFR PART#=RT0805BRD0710KL, ComponentLink1Description="Data Sheet", ComponentLink1URL=https://www.lcsc.com/datasheet/C95781.pdf?spm=wm.sxq.inf.ggs___wm.fly.bg.2.xh&lcsc_vid=RAIMXwZeRgRXUFAAT1RZBAEFEVIIVgdSQFlfUgUDFQcxVlNeQVRaVlNURlFeXzsOAxUeFF5JWBYZEEoKFBINSQcJGk4eFQsCAgIaSgADAwAHC0sFHwgeShYDBAgdEwsUWhIbFQIHFARDCgsTGRUxEQtLR1leUklTWlAFOCdUT1lXUlZVWQkaCgg%3D, Supplier=LCSC, Supplier PART#=C110775
R3 R6 R9 R10 R12: library part RES_0805_220, "RES 220Ω ±0.1% 125mW 0805", MFR=YAGEO, MFR PART#=RT0805BRD07220RL, ComponentLink1Description="Data Sheet", ComponentLink1URL=https://www.lcsc.com/datasheet/C865304.pdf?spm=wm.sxq.inf.ggs___wm.fly.bg.8.xh&lcsc_vid=RAIMXwZeRgRXUFAAT1RZBAEFEVIIVgdSQFlfUgUDFQcxVlNeQFJfUlFQQ1NaVzsOAxUeFF5JWBYZEEoKFBINSQcJGk4NBhADEA4cHktfQ1hADxALGw%3D%3D, Supplier=LCSC, Supplier PART#=C865304
R4 R5: library part RES_0805_5.1K, "RES 5.1kΩ ±1% 125mW 0805", MFR=YAGEO, MFR PART#=RC0805FR-075K1L, ComponentLink1Description="Data Sheet", ComponentLink1URL=https://www.lcsc.com/datasheet/C84375.pdf?spm=wm.sxq.inf.ggs___wm.fly.bg.2.xh&lcsc_vid=RAIMXwZeRgRXUFAAT1RZBAEFEVIIVgdSQFlfUgUDFQcxVlNeQFJfX1xTQ1RYXjsOAxUeFF5JWBYZEEoKFBINSQcJGk4dAgUUFAk%3D, Supplier=LCSC, Supplier PART#=C84375
R11: library part RES_0805_20K, "RES 20kΩ ±1% 125mW 0805", MFR=YAGEO, MFR PART#=RC0805FR-0720KL, ComponentLink1Description="Data Sheet", ComponentLink1URL=https://www.lcsc.com/datasheet/C114566.pdf?spm=wm.sxq.inf.ggs___wm.fly.bg.2.xh&lcsc_vid=FgVdAVJeFgAKAVAAT1ldBVYDR1ZcX11XR1lZVl1WEQMxVlNeT1dXUlJURFJfUjsOAxUeFF5JWBYZEEoKFBINSQcJGk4dAgUUFAk%3D, Supplier=LCSC, Supplier PART#=C114566
RT1: "THERMISTOR NTC 10kΩ 0805", MFR=VISHAY, MFR PART#=NTCS0805E3103JHT, ComponentLink1Description="Data Sheet", ComponentLink1URL=https://www.lcsc.com/datasheet/C511025.pdf?spm=wm.sxq.inf.ggs___wm.fly.bg.9.xh&lcsc_vid=FgVdAVJeFgAKAVAAT1ldBVYDR1ZcX11XR1lZVl1WEQMxVlNeT1JZVVFeRldaXzsOAxUeFF5JWBYZEEoKFBINSQcJGk4NBhADEA4cHktXRVZcSQwSGg0%3D, Supplier=LCSC, Supplier PART#=C511025
SW1 SW2: "SWITCH TACTILE SPST SMD", MFR="SHOU HAN", MFR PART#=TS342A2P-WZ, ComponentLink1Description="Data Sheet", ComponentLink1URL=https://www.lcsc.com/datasheet/C557591.pdf?spm=wm.sxq.inf.ggs___wm.fly.bg.15.xh&lcsc_vid=RAIMXwZeRgRXUFAAT1RZBAEFEVIIVgdSQFlfUgUDFQcxVlNeQFJfXlFWRFdeVTsOAxUeFF5JWBYZEEoKFBINSQcJGk4NBhADEA4cHktQQlFADxALGw%3D%3D, Supplier=LCSC, Supplier PART#=C557591
U1: "1A Low Dropout (LDO) Regulator", MFR="Advanced Monolithic Systems", MFR PART#=AMS1117-3.3, ComponentLink1Description="Data Sheet", ComponentLink1URL=https://www.lcsc.com/datasheet/C6186.pdf?spm=wm.sxq.inf.ggs&lcsc_vid=RAIMXwZeRgRXUFAAT1RZBAEFEVIIVgdSQFlfUgUDFQcxVlNeQVRaVlRTQ1NcVTsOAxUeFF5JWBYZEEoBGA4JCwFIFA4DSA%3D%3D, Supplier=LCSC, Supplier PART#=C6186
U2: "Medium-density performance line Arm-based 32-bit MCU with 64 or 128 KB Flash, USB, CAN, 7 timers, 2 ADCs, 9 com. interfaces", MFR=ST, ComponentLink1Description="Data Sheet", ComponentLink1URL=https://www.lcsc.com/datasheet/C8734.pdf?spm=wm.sxq.inf.ggs___wm.ssy.em.0.tz&lcsc_vid=RAIMXwZeRgRXUFAAT1RZBAEFEVIIVgdSQFlfUgUDFQcxVlNeQFJcU1RRRFJcVTsOAxUeFF5JWBYZEEoKFBINSQcJGk4NBhADEA4cHktTQlhADxALGw%3D%3D, MFR PART#=STM32F103C8T6, Supplier=LCSC, Supplier PART#=C8734
U3: "ESD DIODE 5.25VWM 17VC SOT-23-6L", MFR=ST, ComponentLink1Description="Data Sheet", ComponentLink1URL=https://www.lcsc.com/datasheet/C7519.pdf?spm=wm.sxq.inf.ggs___wm.fly.bg.0.xh&lcsc_vid=RAIMXwZeRgRXUFAAT1RZBAEFEVIIVgdSQFlfUgUDFQcxVlNeQFJfUVNWT1lXUDsOAxUeFF5JWBYZEEoKFBINSQcJGk4NBhADEA4cHktXRlhXSQwSGg0%3D, MFR PART#=USBLC6-2SC6, Supplier=LCSC, Supplier PART#=C7519
U4: "PUSH-PULL FOUR CHANNEL DRIVER WITH DIODES", MFR=ST, ComponentLink1Description="Data Sheet", ComponentLink1URL=https://www.lcsc.com/datasheet/C12340.pdf?spm=wm.sxq.inf.ggs___wm.ssy.bg.0.xh&lcsc_vid=FgVdAVJeFgAKAVAAT1ldBVYDR1ZcX11XR1lZVl1WEQMxVlNeT1dcUlJXR1hbUjsOAxUeFF5JWBYZEEoKFBINSQcJGk4dAgUUFAk%3D, MFR PART#=L293D, Supplier=LCSC, Supplier PART#=C12340
X1: "CRYSTAL 8MHz 20pF SMD", MFR="YXC Crystal Oscillators", MFR PART#=X49SM8MSD2SC, ComponentLink1Description="Data Sheet", ComponentLink1URL=https://www.lcsc.com/datasheet/C12674.pdf?spm=wm.sxq.inf.ggs___wm.fly.bg.17.xh&lcsc_vid=RAIMXwZeRgRXUFAAT1RZBAEFEVIIVgdSQFlfUgUDFQcxVlNeQFJdUVVTQFJfUTsOAxUeFF5JWBYZEEoKFBINSQcJGk4eFQsCAgIaSgADAwAHC0slQlNYUlNRRE8GEwkK, Supplier=LCSC, Supplier PART#=C12674
X2: "CRYSTAL 32.768kHz 12.5pF SMD", MFR=NDK, MFR PART#=NX3215SA-32.768K-STD-MUA-8, ComponentLink1Description="Data Sheet", ComponentLink1URL=https://www.lcsc.com/datasheet/C156245.pdf?spm=wm.sxq.inf.ggs&lcsc_vid=RAIMXwZeRgRXUFAAT1RZBAEFEVIIVgdSQFlfUgUDFQcxVlNeQFJcUFNXQ1NfXjsOAxUeFF5JWBYZEEoKFBINSQcJGk4dAgUUFAk%3D, Supplier=LCSC, Supplier PART#=C156245

## Free pads (board coordinates)
  round 3.2 hole 3 paste+0 mask+0.05: H(59.475,46.025) H(59.475,110.25) H(124.125,109.725) H(124.95,46.025)

## Via types
v1: diameter 1.27, hole 0.711, Top Layer to Bottom Layer, tented both sides, 27 vias

## Nets (pads, with @x,y where several pads share a name; then routed paths per layer and width w, separated by ;. In a path a pad name is that pad's centre, name@x,y a point inside that pad or via, vN(x,y) a via of type N, cw(c..) or ccw(c..) an arc to the next point about the centre after c; other vN are vias at no path point)
+3V3: C1.2 C3.2 C9.2 C10.2 C11.2 C12.2 C13.2 C14.2 D1.1 J2.1 LDR1.2 R1.1 RT1.2 SW1.2 U1.2 U2.1 U2.9 U2.24 U2.36 U2.48 | length 55.9
  Top Layer w0.381: C13.2@77.906,76.541 80.94,76.541 81.406,77.007 81.406,77.477 81.888,77.959 81.888,78.043 82.752,78.907 U2.9 ; 83.968,82.907 85.146,82.907 85.187,82.947 85.187,83.012 85.411,83.236 ; 86.249,85.076 86.304,85.076 86.527,84.852 U2.48 U2.48@86.527,84.038 ; U2.24 92.027,75.538 92.714,74.851 93.374,74.851 ; U2.36 93.338,82.907 96.375,85.944 C11.2@96.375,86.3
  Top Layer w0.5: 82.925,83.95 83.968,82.907 ; 85,86.325 86.249,85.076 ; 85.411,83.236 85.94,83.765 86.115,83.765 86.325,83.975 ; 93.374,74.851 94.087,74.138
  Top Layer w0.7: v1(66.4,64.3) R1.1@68.55,64.3 ; v1(72.925,92.325) D1.1@75.075,92.325 ; v1(76,76.525) 76.036,76.561 77.814,76.561 C13.2@77.85,76.525 ; v1(79.012,83.95) 82.925,83.95 ; v1(79.7,63.375) 79.7,63.221 80.025,62.896 RT1.2@80.025,60.95 ; v1(83.825,68.375) 83.825,68.221 84.533,67.513 LDR1.2@84.533,64.975 ; C1.2 87.25,95.275 87.25,98.55 SW1.2 ; v1(87.225,93) C1.2@87.225,95.15 ; 94.087,73.478 94.087,74.138 ; v1(94.975,69.7) C12.2@94.975,71.85 ; C11.2@96.3,86.225 v1(98.45,86.225) ; U1.2@120.35,101.225 v1(120.35,103.375)
  Top Layer w0.8: 85,86.325 C10.2
  Top Layer w1: 94.087,73.478 94.773,72.792
  Top Layer w1.3: 94.773,72.792 95,72.565 C12.2
+5: J5.1 J6.1 J7.1 J8.1 U4.8 U4.16 | length 153.3
  Bottom Layer w1.2: J8.1 77.29,106.7 76.003,106.7 75.3,105.997 75.3,90.35 77.65,88 77.65,65.584 76.1,64.034 J6.1 73.575,49.575 73.575,47.378 74.278,46.675 84.347,46.675 85.401,47.729 J7.1 87.482,50.368 90.5,47.35 118.9,47.35 121.33,49.78 121.33,53.04 U4.16 121.34,55.86 119.447,57.753 104.674,57.753 103.972,58.456 103.972,61.159 103.56,61.571 U4.8 98.009,67.135 98.009,67.401 J5.1
BOOT0: C1.1 R2.2 SW1.1 U2.44 | length 12.8
  Top Layer w0.381: SW1.1 SW1.1@84.111,98.239 ; C1.1 85.125,93.275 88.527,89.873 U2.44
ESD_N: U2.32 U3.6 | length 13.7
  Top Layer w0.208: U2.32 93.727,80.907 93.872,81.052 96.885,81.052 97.108,81.275 105.171,81.275 105.821,80.625 U3.6
ESD_P: U2.33 U3.4 | length 13.8
  Top Layer w0.208: U2.33 96.767,81.407 97.135,81.775 104.9,81.775 105.205,82.08 105.478,82.08 105.6,82.202 105.6,82.403 105.722,82.525 U3.4
GND: C2.1 C3.1 C4.1 C5.1 C6.1 C7.1 C8.1 C9.1 C10.1 C11.1 C12.1 C13.1 C14.1 D2.2 D3.1 J1.3 J2.4 J3.A1 J3.B1 J5.3 J6.3 J7.3 J8.2 LS1.2 R2.1 R3.2 R4.2 R5.2 R7.2 R11.2 R13.2 SW2.1 U1.1 U2.8 U2.23 U2.35 U2.47 U3.2 U4.4 U4.5 U4.12 U4.13 | length 115.8
  Top Layer w0.381: v1(68.15,81.175) 68.191,81.216 70.166,81.216 ; C4.1 C7.1 ; C6.1@70.231,89.87 74.415,89.87 74.824,89.46 R3.2 ; C6.1 70.325,89.994 v1(70.325,91.825) ; C5.1@70.284,72.791 70.284,70.816 v1(70.325,70.775) ; v1(72.1,61.725) 72.1,63.241 SW2.1@72.284,63.425 ; SW2.1 72.673,63.898 73.473,63.898 75.165,65.59 75.195,65.59 75.575,65.97 C8.1 ; v1(75.975,78.55) 75.998,78.574 77.799,78.574 77.849,78.624 77.906,78.566 C13.1@78.291,78.566 ; v1(77.15,96.6) 77.191,96.641 R2.1@79.166,96.641 ; C13.1@78.291,78.541 80.97,78.541 C14.1 81.026,78.627 81.806,79.407 U2.8 ; R13.2@79.684,57.934 81.659,57.934 v1(81.7,57.975) 84.093,60.368 R7.2 ; C9.1@81.091,86.334 81.091,89.241 v1(82.375,90.525) 86.175,90.525 87,89.7 C10.1 87.014,87.636 87.014,84.42 U2.47 ; R11.2 86.7,74.249 85.925,75.024 85.925,76.802 86.148,77.025 91.263,77.025 91.486,76.802 91.486,75.948 U2.23 91.527,74.52 93,73.047 C12.1 ; v1(91.6,57.4) 91.641,57.359 D3.1@91.641,55.384 ; v1(92.95,69.775) 92.975,69.8 92.975,71.356 C12.1@93.009,71.391 ; U2.35 93.52,82.407 93.578,82.465 93.998,82.465 95.424,83.89 95.995,83.89 96.375,84.27 C11.1@96.375,84.3 ; C11.1@96.384,84.059 98.359,84.059 v1(98.4,84.1) ; D2.2@104.459,75.866 104.459,73.891 v1(104.5,73.85) ; U3.2 108.716,81.466 107.924,81.466 107.701,81.242 107.701,78.974 109.835,76.84 J1.3 ; v1(110.175,100.15) 110.225,100.2 112.35,100.2 C3.1 ; v1(114.35,88.525) 114.383,88.492 116.227,88.492 R5.2@116.269,88.45 ; v1(115.175,94.25) 118.093,94.25 U1.1 ; R4.2 116.344,75.522 119.091,78.268 119.091,78.766 119.2,78.875 J3.A1 ; R5.2 117.793,88.459 118.175,88.077 118.175,86.575 119.091,85.66 119.091,85.385 119.2,85.275 J3.B1 ; R4.2@116.3,75.45 116.309,75.441 116.309,73.466 v1(116.35,73.425) ; C2.1@125.788,91.362 125.788,91.512 125.825,91.55 125.825,94.925 v1(125.8,94.95)
NetD1_2: D1.2 R3.1
NetD2_1: D2.1 R6.1 | length 1.7
  Top Layer w0.381: R6.1@100.409,75.925 D2.1@102.12,75.925
NetD3_2: D3.2 R9.1 | length 7.4
  Top Layer w0.381: R9.1 88.775,55.65 90.065,54.36 91.365,54.36 D3.2
NetD3_3: D3.3 R10.1 | length 6.4
  Top Layer w0.381: R10.1 95.1,57.406 94.133,56.439 94.133,54.829 94.304,54.658 94.317,54.658 94.925,54.05 D3.3
NetD3_4: D3.4 R12.1 | length 7.3
  Top Layer w0.381: D3.4 97.55,55.45 99.7,57.6 R12.1
NetJ3_A5: J3.A5 R4.1 | length 5.5
  Top Layer w0.381: R4.1 116.269,78.994 118.1,80.825 J3.A5
NetJ3_B5: J3.B5 R5.1 | length 4.8
  Top Layer w0.381: R5.1 116.613,86.215 116.613,85.387 118.175,83.825 J3.B5
NetJ6_2: J6.2 R8.1 | length 24.7
  Top Layer w0.381: J6.2 74.579,53.896 75.808,55.125 78.375,55.125 79.15,55.9 81.375,55.9 84.294,58.819 84.869,58.819 85.5,59.45 85.5,62.15 86.025,62.675 86.025,65.838 87.7,67.513 R8.1@87.7,69.7
NRST: C8.2 R1.2 SW2.2 U2.7 | length 22
  Top Layer w0.381: C8.2 75.575,68.03 75.195,68.41 75.165,68.41 74.3,69.275 74.3,78.375 75.832,79.907 U2.7
OSC_IN: C4.2 U2.5 X1.1 | length 16.2
  Top Layer w0.381: C4.2 71.503,76.978 75.432,80.907 U2.5
OSC_IN32: C6.2 U2.3 X2.1 | length 17.4
  Top Layer w0.381: C6.2 70.507,87.624 70.507,87.043 75.643,81.907 U2.3
OSC_OUT: C5.2 U2.6 X1.2 | length 17.9
  Top Layer w0.381: C5.2 71.296,74.533 71.519,74.756 71.519,76.276 75.65,80.407 U2.6
OSC_OUT32: C7.2 U2.4 X2.2 | length 16.3
  Top Layer w0.381: C7.2 71.243,85.582 75.418,81.407 U2.4
OUT1: J4.1 U4.3 | length 6.8
  Top Layer w0.381: J4.1 113.425,64.419 U4.3
OUT2: J4.2 U4.6 | length 6.6
  Top Layer w0.381: U4.6 110.885,63.829 J4.2
PA0: R13.1 RT1.1 U2.10 | length 21.2
  Top Layer w0.381: RT1.1@78.011,61.112 78.011,66.442 79.175,67.606 79.175,70 80.275,71.1 80.275,74.346 82.117,76.189 82.117,77.506 82.371,77.76 82.371,77.843 82.934,78.407 U2.10
PA1: LDR1.1 R7.1 U2.11 | length 14.8
  Top Layer w0.381: LDR1.1@81.9,65.25 81.9,65.875 82.6,66.575 82.6,77.306 82.853,77.56 82.853,77.643 83.076,77.866 84.554,77.866 84.595,77.907 U2.11
PA2: R8.2 R11.1 U2.12 | length 9.9
  Top Layer w0.381: R11.1@84.777,72.573 85.35,72 85.35,70.188 85.8,69.738 R8.2@85.8,69.7 ; U2.12 84.737,77.367 84.367,77.367 84.367,76.997 84.35,76.98 84.35,72.708 84.39,72.667 84.39,72.41 R11.1 ; R8.2@85.169,70.209 85.191,70.209 85.6,69.8 R8.2@85.6,69.762
PA6: J7.2 U2.16 | length 28.4
  Top Layer w0.381: J7.2@82.975,50.444 82.975,53.6 83.975,54.6 83.975,57.025 86.075,59.125 86.075,61.825 86.55,62.3 86.55,65.644 89.042,68.136 89.042,71.2 88.027,72.216 U2.16
PA7: U2.17 U4.1 | length 76
  Top Layer w0.381: U2.17 88.527,72.398 89.525,71.4 89.525,67.775 87.325,65.575 87.325,62.075 86.725,61.475 86.725,58.675 85.577,57.527 85.577,55.771 89.173,52.175 93.175,52.175 94.125,51.225 95.175,51.225 96.95,49.45 122.225,49.45 124.69,51.915 124.69,58.234 U4.1
PB0: R9.2 U2.18 | length 17.3
  Top Layer w0.381: U2.18 89.044,75.89 89.044,72.581 90.075,71.55 90.075,60.3 90.265,60.11 90.265,59.984 90.8,59.45 R9.2@90.925,59.45
PB1: R10.2 U2.19 | length 17.3
  Top Layer w0.381: U2.19@89.585,75.311 89.585,72.79 90.625,71.75 90.625,67.375 93.2,64.8 R10.2
PB5: LS1.1 U2.41 | length 21.1
  Top Layer w0.381: U2.41 90.068,84.447 90.068,84.985 90.085,85.003 90.085,85.128 90.256,85.299 90.977,85.299 91.2,85.522 91.2,88.325 92.05,89.175 92.05,91.65 92.75,92.35 92.75,95.5 93.35,96.1 93.35,100.55 94.977,102.177 LS1.1
PB10: R12.2 U2.21 | length 19.4
  Top Layer w0.381: U2.21 90.527,72.798 91.125,72.2 91.125,68.65 97.525,62.25 97.525,59.775 R12.2
PB12: J5.2 U2.25 | length 14.3
  Top Layer w0.381: U2.25 93.391,77.407 93.432,77.367 93.432,76.043 94.95,74.525 96.6,74.525 97.22,73.905 97.845,73.905 100.4,71.35 J5.2@100.4,67.5
PB13: U2.26 U4.2 | length 40.6
  Top Layer w0.381: U2.26 94.843,77.907 100.125,72.625 102.5,72.625 106.225,68.9 106.225,64.8 104.85,63.425 104.85,60.8 106,59.65 116,59.65 117.902,61.552 118.768,61.552 U4.2
PB14: U2.27 U4.7 | length 25.3
  Top Layer w0.381: U2.27 95.218,78.407 99.375,74.25 100.475,74.25 101.5,73.225 102.925,73.225 106.8,69.35 106.8,63.65 106.1,62.95 U4.7
PB15: R6.2 U2.28 | length 7.3
  Top Layer w0.381: U2.28 99.442,78.907 99.666,78.684 99.666,78.484 100.075,78.075 R6.2
SWCLK: J2.2 U2.37 | length 16.3
  Top Layer w0.381: U2.37 92.027,84.776 92.068,84.817 92.717,84.817 93.769,85.869 93.769,86.944 95.85,89.025 104.193,89.025 105.065,89.896 J2.2@105.196,89.896
SWDIO: J2.3 U2.34 | length 16.9
  Top Layer w0.381: U2.34 93.646,81.907 93.687,81.947 93.743,81.947 93.76,81.965 93.998,81.965 94.015,81.982 94.198,81.982 94.791,82.575 99.4,82.575 103.425,86.6 105.37,86.6 J2.3@107.377,88.608
UART_RX: J1.1 U2.30 | length 23.8
  Top Layer w0.381: U2.30 93.317,79.867 100.426,79.867 101.732,78.56 104.425,78.56 109.625,73.36 109.625,72.65 110.725,71.55 J1.1@113.23,71.55
UART_TX: J1.2 U2.31 | length 21.7
  Top Layer w0.381: U2.31@93.687,80.366 100.609,80.366 101.932,79.043 104.657,79.043 109.15,74.55 111.525,74.55 111.775,74.3 J1.2
USB_N: J3.A7 J3.B7 U3.1 | length 13.5
  Top Layer w0.208: U3.1 109.529,80.625 110.229,81.325 119.99,81.325 120.255,81.59 120.255,82.06 120.135,82.18 120.009,82.18 120.154,82.325 J3.A7
USB_P: J3.A6 J3.B6 U3.3 | length 12.7
  Top Layer w0.208: U3.3 109.529,82.525 110.229,81.825 118.796,81.825 ; J3.A6 118.796,81.825 ; J3.B6 118.796,82.825 118.796,82.662 118.695,82.56 118.695,82.09 118.796,81.988 118.796,81.825
VBUS: C2.2 J3.A4 J3.B4 U1.3 U3.5 | length 30.6
  Top Layer w0.381: U3.5 106.634,81.685 107.352,81.685 107.575,81.908 107.575,82.894 107.798,83.117 109.667,83.117 112.525,85.975 112.775,85.975 112.875,86.075 112.875,89.2 114.55,90.875 C2.2@123.6,90.875 ; J3.A4 119.485,79.685 120.386,79.685 121.3,80.599 121.3,83.425 120.359,84.366 119.585,84.366 J3.B4
pads on no net: J3.A8 J3.B8 J3.S1 J3.S2 J3.S3 J3.S4 U2.2 U2.13 U2.14 U2.15 U2.20 U2.22 U2.29 U2.38 U2.39 U2.40 U2.42 U2.43 U2.45 U2.46 U4.9 U4.10 U4.11 U4.14 U4.15

## Polygon pours and split planes (outlines as drawn)
PA0 on Top Layer "PA0_L01_P008" (solid, remove dead copper, pour order 8): 78.4,61.175 77.975,61.175 77.075,60.75 76.775,57.225 77.625,56.375 78.375,56.375 78.575,56.85 78.825,60.75
PA1 on Top Layer "PA1_L01_P013" (solid, remove dead copper, pour order 13): 81.675,66.53 80.775,65.63 80.975,61.625 81.4,60.255 82.55,60.255 83.275,60.98 83.275,66.33
VBUS on Top Layer "VBUS_L01_P011" (solid, remove dead copper, pour order 11): 123.793,95.152 123.293,95.652 121.868,95.55 121.925,91.875 121.118,90.602 120.993,86.527 120.743,85.777 120.743,85.277 120.243,84.777 118.943,84.777 118.943,84.477 119.271,84.15 121.868,84.477 122.66,88.056 124.15,90.602 124.55,91.7 124.6,92.25 124.893,93.602 124.893,94.052 124.718,94.482
+3V3 on Top Layer "+3V3_L01_P012" (solid, remove dead copper, pour order 12): 115,101.675 113.95,100.625 113.95,99.025 113.975,99.025 117.375,97.2 118.787,95.787 119.132,92.968 119.971,92.129 121.025,92.875 121.5,96.825 123.15,98.9 123.15,100.475 121.9,101.725
NRST on Top Layer "NRST_L01_P010" (solid, remove dead copper, pour order 10): 69.25,67.75 68.1,67.75 67.45,67.1 67.45,65.75 67.9,65.3 67.975,65.375 72.975,65.375 74.75,67.15 76.825,67.45 77.375,68.225 75.95,69.65 74.325,69.325 73.8,68.55 73.15,67.9
OSC_OUT on Top Layer "OSC_OUT_L01_P007" (solid, remove dead copper, pour order 7): 62.675,73.375 60.675,73.375 59.475,72.175 59.475,66.55 59.625,66.4 63.65,67.125 65.5,69.25 66.375,71.1 69.1,73.825 71.575,73.825 71.575,74.6 70.625,75.55
OSC_IN on Top Layer "OSC_IN_L01_P006" (solid, remove dead copper, pour order 6): 63.875,82.55 61.025,82.55 59.275,80.8 59.275,77.05 60.975,75.35 61,75.375 68.325,75.375 69.275,76.325 70.925,76.325 70.925,77.525 70.3,78.15 66.2,78.15 65,79.35 65,81.825
OSC_OUT32 on Top Layer "OSC_OUT32_L01_P005" (solid, remove dead copper, pour order 5): 66.15,86.95 64.075,86.95 63.15,86.025 63.15,85 63.175,85 63.975,84.2 66.45,84.2 67.15,84.9 67.175,84.875 71.025,84.875 71.025,85.5 70.1,86.425 67.45,86.425
OSC_IN32 on Top Layer "OSC_IN32_L01_P004" (solid, remove dead copper, pour order 4): 65.025,89.725 64.35,89.725 63.775,89.15 63.775,87.6 68.5,87.6 69.25,87.05 71.75,87.3 71.875,87.925 71.475,88.725 67.55,88.925
BOOT0 on Top Layer "BOOT0_L01_P000" (solid, remove dead copper, pour order 0): 82.603,100.461 80.525,98.175 80.175,95.6 83.3,93.95 85.789,94.308 86.137,99.088 85,100.225
NetD1_2 on Top Layer "NETD1_2_L01_P003" (solid, remove dead copper, pour order 3): 76.724,88.274 78.099,88.274 78.849,89.024 78.849,92.349 77.049,94.149 76.374,94.149 76.049,93.824 76.049,90.324 75.724,89.999 75.724,88.574
+3V3 on Int2 (PWR) "+3V3_L03_P017" (solid, remove dead copper, pour order 17): 57.25,111.8 57.325,111.8 58.075,112.275 58.8,112.275 126.5,112.275 126.852,45.356 125.387,44.15 57.8,44.15
GND on Int1 (GND) "GND_L02_P014" (solid, remove dead copper, pour order 14): 57.265,112.024 57.95,112.475 126.84,112.412 127.15,45.7 125.65,44.2 57.675,44.2

## Keep-outs
Keep-Out Layer:
  the board outline again, w0.254

## Silkscreen, mask and mechanical layers (free items; w line width, h text height)
Top Overlay:
  drawing of 34 lines, arcs and shapes, not listed
  text "TEAM 5" at 111.025,109.322 h3
  text "GND" at 64.875,106.356 h1.52
  text "5V" at 81.725,106.356 h1.52
  text "3V3" at 102.66,93.218 h1 r330
  text "SWCLK" at 104.582,92.137 h0.7 r330
  text "SWDIO" at 107.082,90.662 h0.7 r330
  text "GND" at 109.535,89.193 h1 r330
  text "ST LINK" at 101.466,88.152 h1.52 r330
  text "Uart" at 110.8,78.856 h1.52
  text "GND" at 110.02,77.85 h1 r270
  text "TX" at 110.02,75.074 h1 r270
  text "RX" at 110.02,72.728 h1 r270
  text "PIR" at 96.925,69.331 h1.52
  text "FAN" at 115.475,65.881 h1.52
  text "5V" at 97.275,64.92 h1
  text "OUT" at 99.35,64.92 h1
  text "GND" at 102.2,64.92 h1
  text "MQ-2" at 68.929,55.496 h1.52 r45
  text "GND" at 69.889,54.639 h1 r315
  text "A0" at 72.039,52.439 h1 r315
  text "Servo" at 78.625,52.251 h1.3
  text "5V" at 73.814,50.664 h1 r315
  text "Signal" at 81.65,47.974 h0.7
  text "GND" at 79.15,47.795 h1
  text "5V" at 84.775,47.795 h1